# EAGLE board led_controller (EAGLE 7.5.0)
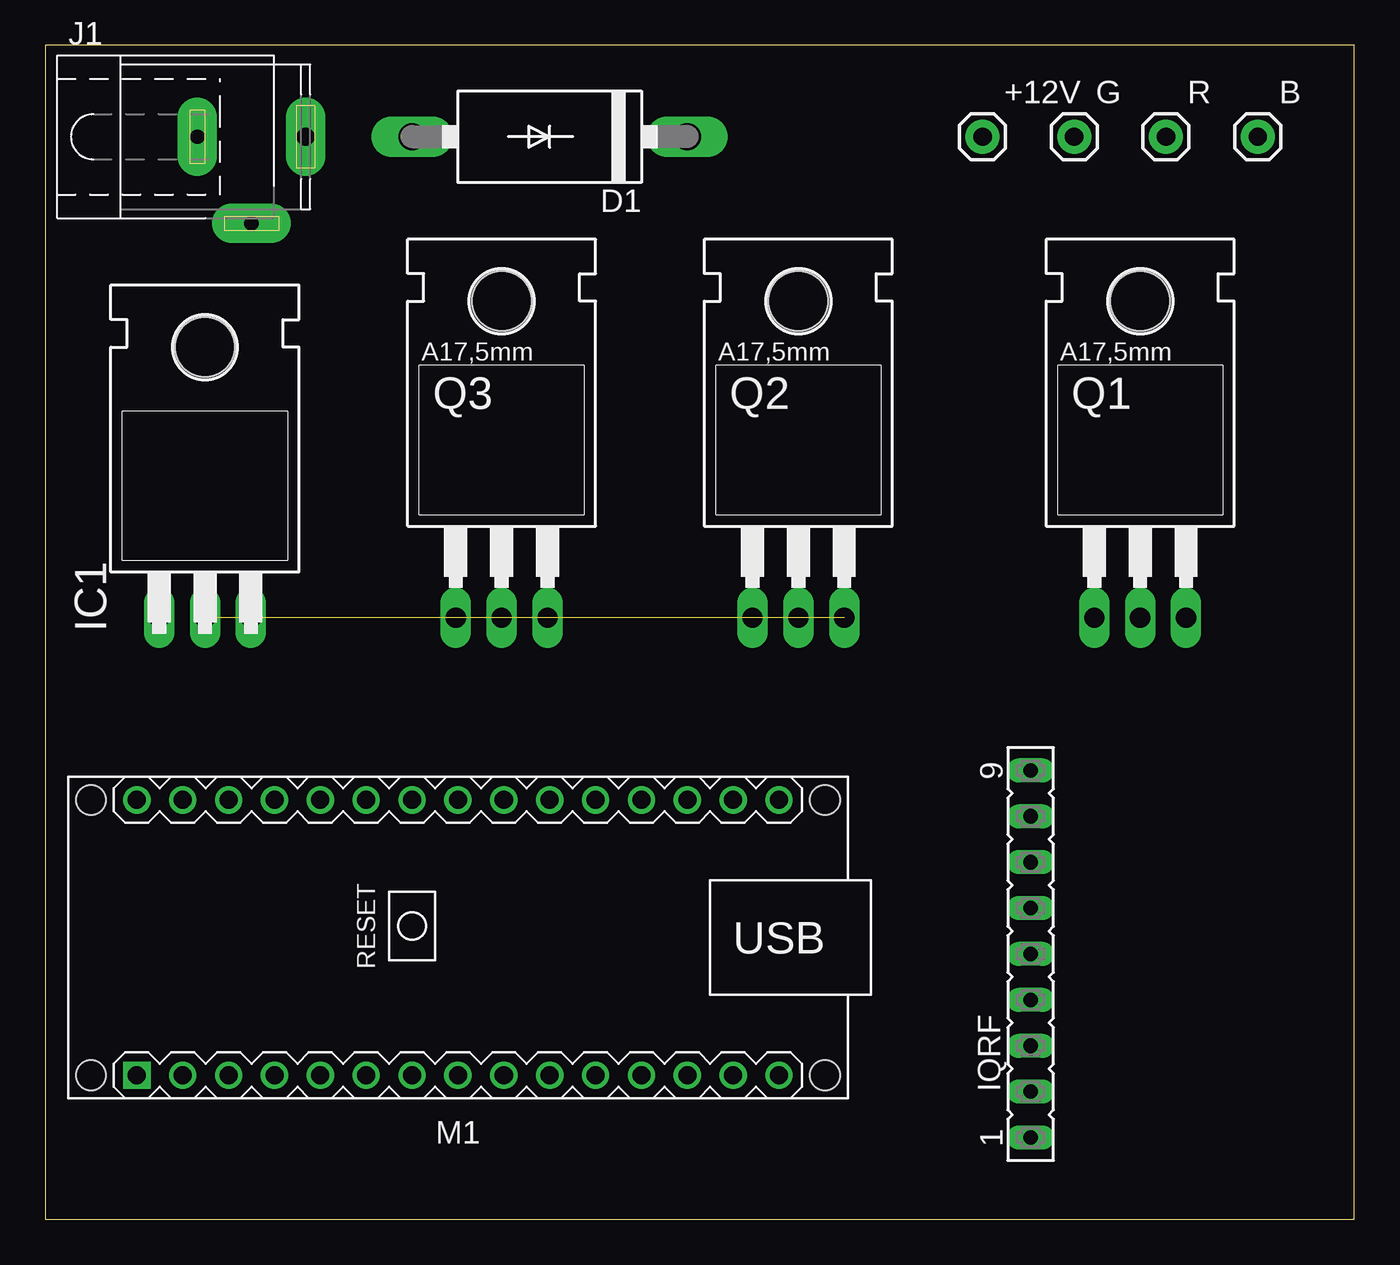
[diagram p0: board, top side]
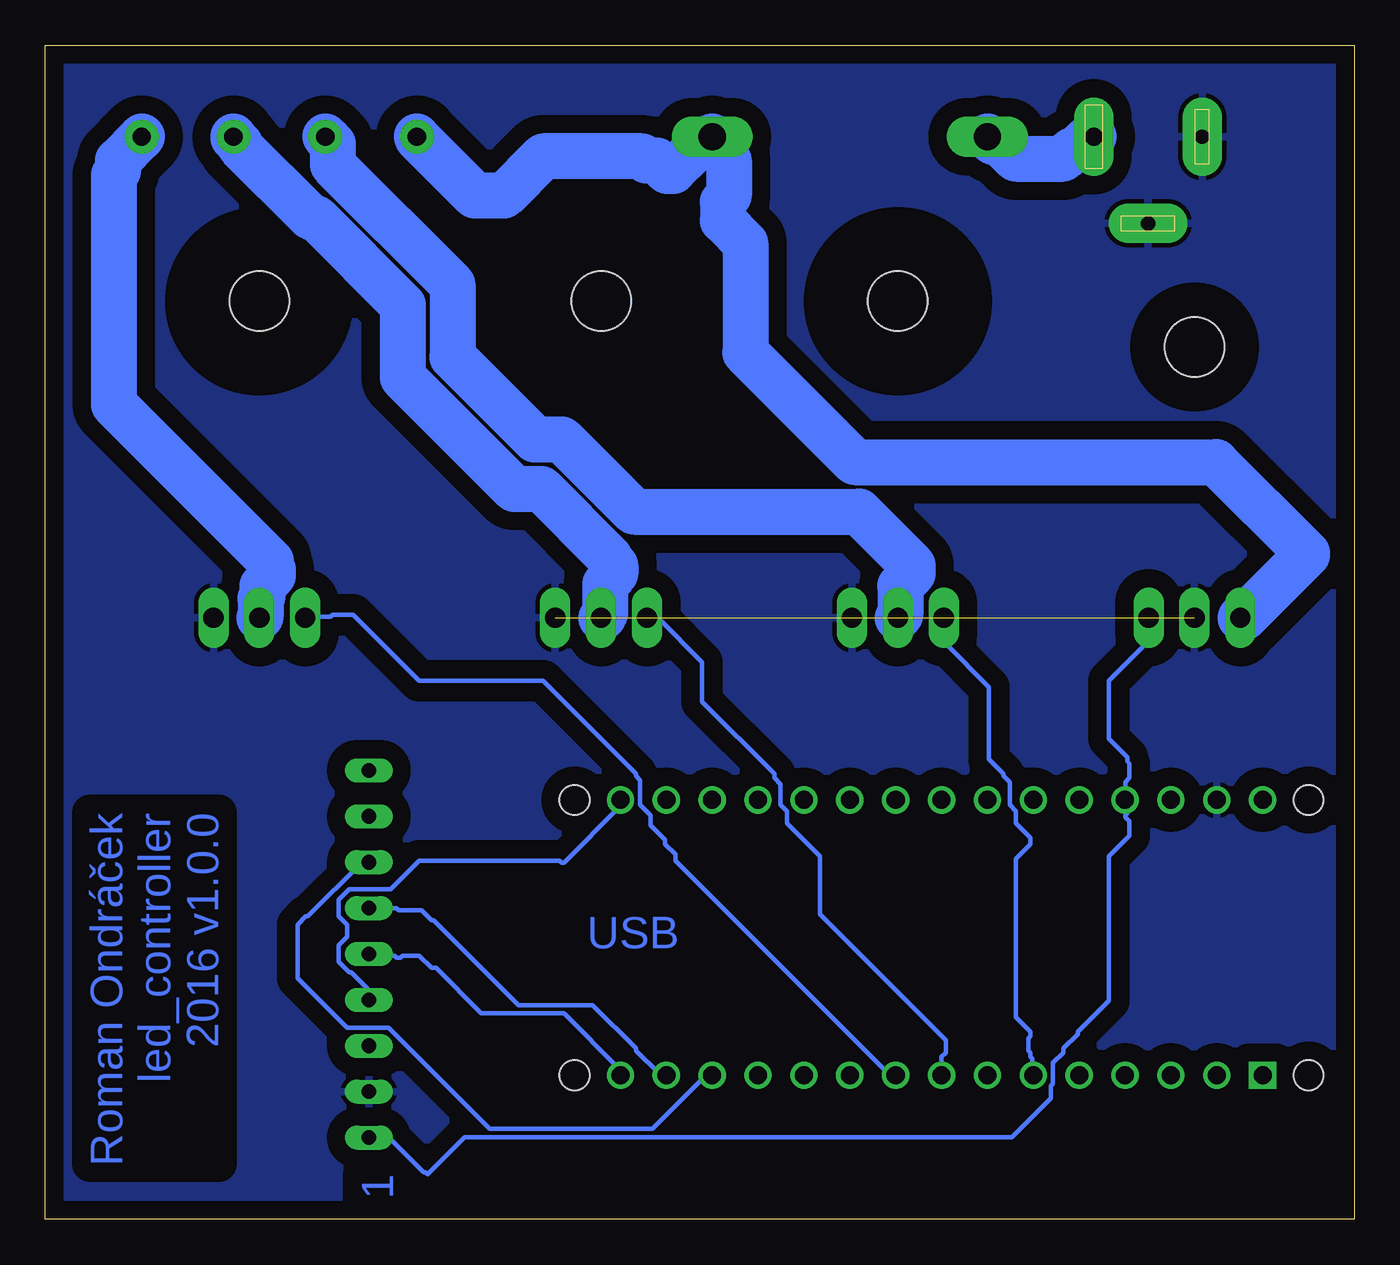
[diagram p1: board, bottom side, seen from below]

Size 72.5 x 65 mm. Coordinates in mm from the lower left corner, seen from the top.
Outline: 0,0 72.5,0 72.5,65 0,65 0,0
Copper layers (1*16): Top 0.035mm / dielectric 1.5mm / Bottom 0.035mm
Design rules "default": minimum track width 10mil, minimum drill 24mil, track to track 8mil, track to pad 8mil, pad to pad 8mil, via to via 8mil, smd to smd 8mil, copper to edge 40mil, drill to drill 8mil, minimum pad ring 10mil, minimum via ring 8mil, stop-mask expansion 4mil, vias tented up to drill 0mil, thermal gap 10mil
Net classes: 0 default: width 0.254 mm; 1 3apm: width 2.54 mm

## Footprints (pad centres in the part's own frame; a part is rotated, then mirrored left to right if it is on the bottom)
1X01 = drill 1.016 pad 1.88: 1 0,0
DO27-15 = drill 1.499 long: A 7.62,0; C -7.62,0
TO220H = drill 1.118 long: 1 -2.54,-10.16; 2 0,-10.16; 3 2.54,-10.16 | hole 3.302: 0,4.826
FE09 = drill 0.813 long: 1 -10.16,0; 2 -7.62,0; 3 -5.08,0; 4 -2.54,0; 5 0,0; 6 2.54,0; 7 5.08,0; 8 7.62,0; 9 10.16,0
SPC4078 = drill 0.8 pad 2.184 long: 1 -3,0; 2 0,-4.8 | drill 1 pad 2.184 long: 3 3,0
ARDUINO-NANO-3.0 = drill 1 square: J1.1 17.78,7.62 | drill 1: J1.2 15.24,7.62; J1.3 12.7,7.62; J1.4 10.16,7.62; J1.5 7.62,7.62; J1.6 5.08,7.62; J1.7 2.54,7.62; J1.8 0,7.62; J1.9 -2.54,7.62; J1.10 -5.08,7.62; J1.11 -7.62,7.62; J1.12 -10.16,7.62; J1.13 -12.7,7.62; J1.14 -15.24,7.62; J1.15 -17.78,7.62; J2.1 17.78,-7.62; J2.2 15.24,-7.62; J2.3 12.7,-7.62; J2.4 10.16,-7.62; J2.5 7.62,-7.62; J2.6 5.08,-7.62; J2.7 2.54,-7.62; J2.8 0,-7.62; J2.9 -2.54,-7.62; J2.10 -5.08,-7.62; J2.11 -7.62,-7.62; J2.12 -10.16,-7.62; J2.13 -12.7,-7.62; J2.14 -15.24,-7.62; J2.15 -17.78,-7.62 | hole 1.651: -20.32,7.62; -20.32,-7.62; 20.32,-7.62; 20.32,7.62
TO220AH = drill 1.118 long: B -2.54,-6.35; C 0,-6.35; E 2.54,-6.35 | hole 3.302: 0,11.176

## Placement (x,y rotation side)
+12V  +12V  [1X01]  51.91,59.93 0 top
B  GND  [1X01]  67.15,59.93 0 top
D1  BY550  [DO27-15]  27.94,59.93 180 top
G  GND  [1X01]  56.99,59.93 0 top
IC1  MC78M05CTG  [TO220H]  8.85,43.46 0 top
IQRF  [FE09]  54.57,14.69 90 top
J1  [SPC4078]  11.43,59.93 0 top
M1  ARDUINO-NANO-3.0  [ARDUINO-NANO-3.0]  22.86,15.6 180 top
Q1  TIP120  [TO220AH]  60.64,39.65 0 top
Q2  TIP120  [TO220AH]  41.71,39.65 0 top
Q3  TIP120  [TO220AH]  25.28,39.65 0 top
R  GND  [1X01]  62.07,59.93 0 top

## Library data of the parts
+12V B G R = SparkFun-Connectors
D1 = diode
IC1 = linear
IQRF = con-lsta; OC_FARNELL: unknown; OC_NEWARK: unknown
J1 = con-jack; OC_FARNELL: unknown; OC_NEWARK: unknown
M1 = diy-modules
Q1-Q3 = transistor-power

## Nets
3V3: M1.J2.14
+5V: IC1.3 IQRF.1 M1.J2.4
+12V [3apm]: +12V.1 D1.C IC1.1
GND: IC1.2 IQRF.2 J1.1 J1.2 M1.J2.2 Q1.E Q2.E Q3.E
GND.1: M1.J1.4
N$1: M1.J1.9 Q1.B
N$2: M1.J1.8 Q2.B
N$3: M1.J1.6 Q3.B
N$4: IQRF.4 M1.J2.15
N$5: IQRF.5 M1.J1.15
N$6: IQRF.6 M1.J1.14
N$7: IQRF.7 M1.J1.13
N$8 [3apm]: B.1 Q1.C
N$9 [3apm]: Q2.C R.1
N$10 [3apm]: G.1 Q3.C
N$11 [3apm]: D1.A J1.3
VIN: M1.J2.1

## Tracks (layer width: path | path; a pad name or v marks a point on that pad's centre or on a via)
+5V
  Bottom 0.254: IQRF.1 54.52,4.43 53.38,4.43 51.55,2.6 51.44,2.6 51.32,2.49 49.26,4.55 18.97,4.55 16.8,6.72 16.8,7.4 16.69,7.52 16.69,8.66 16.12,9.23 16.12,9.46 15.32,10.26 15.32,10.38 13.6,12.09 13.6,20.09 12.46,21.23 12.46,22.03 12.69,22.26 12.69,22.38 12.57,22.49 12.57,23.06 12.69,23.18 M1.J2.4 12.69,23.29 12.69,24.2 12.46,24.43 12.46,25.23 12.57,25.35 12.57,25.58 13.6,26.6 13.6,29.81 11.43,31.98 11.43,33.23 IC1.3
+12V
  Bottom 2.54: IC1.1 6.29,33.35 6.06,33.35 2.63,36.78 2.63,36.89 7.66,41.92 27.66,41.92 33.72,47.98 33.72,54.04 34.98,55.29 34.98,56.32 34.63,56.67 34.63,58.61 35.55,59.52 35.55,59.87 D1.C 36.69,59.07 37.72,58.04 38.06,58.04 38.63,58.61 39.2,58.61 39.43,58.84 44.92,58.84 47.09,56.67 48.69,56.67 51.89,59.87 +12V.1
GND  (2 unrouted)
  pour Bottom (isolate 1.016): 0,65 72.5,65 72.5,0 0,0
N$1
  Bottom 0.254: M1.J1.9 25.49,8.09 25.83,8.09 37.6,19.86 37.6,20.2 38.18,20.78 38.18,21.01 38.98,21.8 38.98,22.38 39.55,22.95 39.55,24.32 39.78,24.55 39.78,24.66 44.92,29.81 51.78,29.81 55.44,33.46 56.58,33.46 56.69,33.35 58.06,33.35 Q1.B
N$2
  Bottom 0.254: M1.J1.8 22.86,9 22.63,9.23 22.63,9.92 29.6,16.89 29.6,20.09 31.43,21.92 31.43,22.6 31.77,22.95 31.77,24.09 32.12,24.43 32.12,24.66 36.12,28.66 36.12,30.83 38.52,33.23 39.09,33.23 Q2.B
N$3
  Bottom 0.254: M1.J1.6 17.83,8.09 17.83,8.89 17.95,9 17.95,9.23 18.06,9.35 18.06,10.03 17.95,10.15 17.95,10.38 18.75,11.18 18.75,19.98 17.95,20.78 17.95,21.12 18.75,21.92 18.75,22.6 19.09,22.95 19.09,24.2 19.43,24.55 19.43,24.66 20.23,25.46 20.23,29.46 22.63,31.86 22.63,33.23 Q3.B
N$4
  Bottom 0.254: IQRF.4 54.63,12.2 54.63,12.77 55.55,13.69 55.66,13.69 56.24,14.26 56.24,15.18 55.78,15.63 55.78,16.32 56.24,16.77 56.24,17.69 55.66,18.26 53.38,18.26 51.78,19.86 44.01,19.86 43.89,19.75 43.78,19.75 40.69,22.83 40.69,23.18 M1.J2.15
N$5
  Bottom 0.254: IQRF.5 54.52,14.6 53.15,14.6 53.03,14.49 52.81,14.49 52.69,14.6 51.78,14.6 51.09,13.92 50.86,13.92 48.35,11.4 43.78,11.4 40.69,8.32 40.69,8.09 M1.J1.15
N$6
  Bottom 0.254: IQRF.6 54.52,17.23 53.03,17.23 52.92,17.12 51.66,17.12 51.09,16.55 50.98,16.55 46.29,11.86 42.18,11.86 39.78,9.46 39.78,9.35 38.52,8.09 38.18,8.09 M1.J1.14
N$7
  Bottom 0.254: IQRF.7 54.63,19.75 54.98,19.75 57.95,16.77 58.06,16.77 58.52,16.32 58.52,13.35 55.78,10.6 53.49,10.6 47.89,5 38.86,5 35.89,7.97 35.66,7.97 M1.J1.13
N$8
  Bottom 2.54: Q1.C 60.58,33.35 60.58,34.38 60.47,34.49 60.47,35.06 59.89,35.63 59.89,35.98 60.01,36.09 60.01,36.44 68.69,45.12 68.69,57.81 68.47,58.04 68.47,58.61 67.21,59.87 B.1
N$9
  Bottom 2.54: Q2.C 41.6,33.35 41.6,33.46 41.49,33.58 41.49,35.18 40.92,35.75 40.92,36.21 41.26,36.55 41.26,36.66 45.03,40.44 46.52,40.44 52.69,46.61 52.69,50.61 57.49,55.41 57.61,55.41 57.72,55.52 57.84,55.52 61.72,59.41 61.72,59.52 62.06,59.87 R.1
N$10
  Bottom 2.54: Q3.C 25.26,33.35 25.15,33.46 25.15,35.06 24.46,35.75 24.46,36.21 27.43,39.18 39.89,39.18 43.89,43.18 45.38,43.18 49.95,47.75 49.95,51.75 56.58,58.38 56.58,59.52 56.92,59.87 G.1
N$11
  Bottom 2.54: J1.3 14.52,59.87 14.74,59.87 15.43,59.18 15.66,59.18 16.12,58.72 18.75,58.72 19.66,59.64 20,59.64 20.23,59.87 D1.A

## Text on the board
Bottom: Roman Ondráček / led_controller / 2016 v1.0.0 | USB | 1